# EAGLE board 1x3Top (EAGLE 7.3.0)

Size 100 x 80 mm. Coordinates in mm from the lower left corner, seen from the top.
Outline: 0,0 100,0 100,80 0,80 0,0
Outline: 8.45,2.5 19.7,2.5 25.32,12.24 19.7,21.98 8.45,21.98 2.82,12.24 8.45,2.5
Copper layers (1*16): Top 0.035mm / dielectric 1.5mm / Bottom 0.035mm
Design rules "default": minimum track width 10mil, minimum drill 24mil, track to track 8mil, track to pad 8mil, pad to pad 8mil, via to via 8mil, smd to smd 8mil, copper to edge 40mil, drill to drill 8mil, minimum pad ring 10mil, minimum via ring 8mil, stop-mask expansion 4mil, vias tented up to drill 0mil, thermal gap 10mil

## Footprints (pad centres in the part's own frame; a part is rotated, then mirrored left to right if it is on the bottom)
1X04 = drill 1.016 pad 1.88 square: 1 0,0 | drill 1.016 pad 1.88: 2 2.54,0; 3 5.08,0; 4 7.62,0

## Placement (x,y rotation side)
JP1  [1X04]  17.92,4.09 180 top
JP2  [1X04]  10.21,20.37 0 top

## Library data of the parts
JP1 JP2 = SparkFun-Connectors

## Nets
1X3SIN: JP1.4
1X3SOUT: JP1.1
GND: JP1.2
MOSI: JP2.2
NRES: JP2.1
OUT(MISO): JP2.3
SCK: JP2.4
VCC: JP1.3

## Text on the board
tPlace: NRES | MOSI | MISO | SCK | SIN | PWR | GND | SOUT